# Altium PCB BPD30M.PcbDoc (part 2 of 2)
Units mm, origin at the board's own origin, x right, y up, seen from the top; angles counter-clockwise.
Board outline 65 x 70 mm, 4 copper layers (Top Layer, Ground, Power, Bottom Layer), stack 0.603 mm thick; 94 components, 61 nets, 303 pads, 160 vias.
Unrouted connection lines stored in the file: 9.
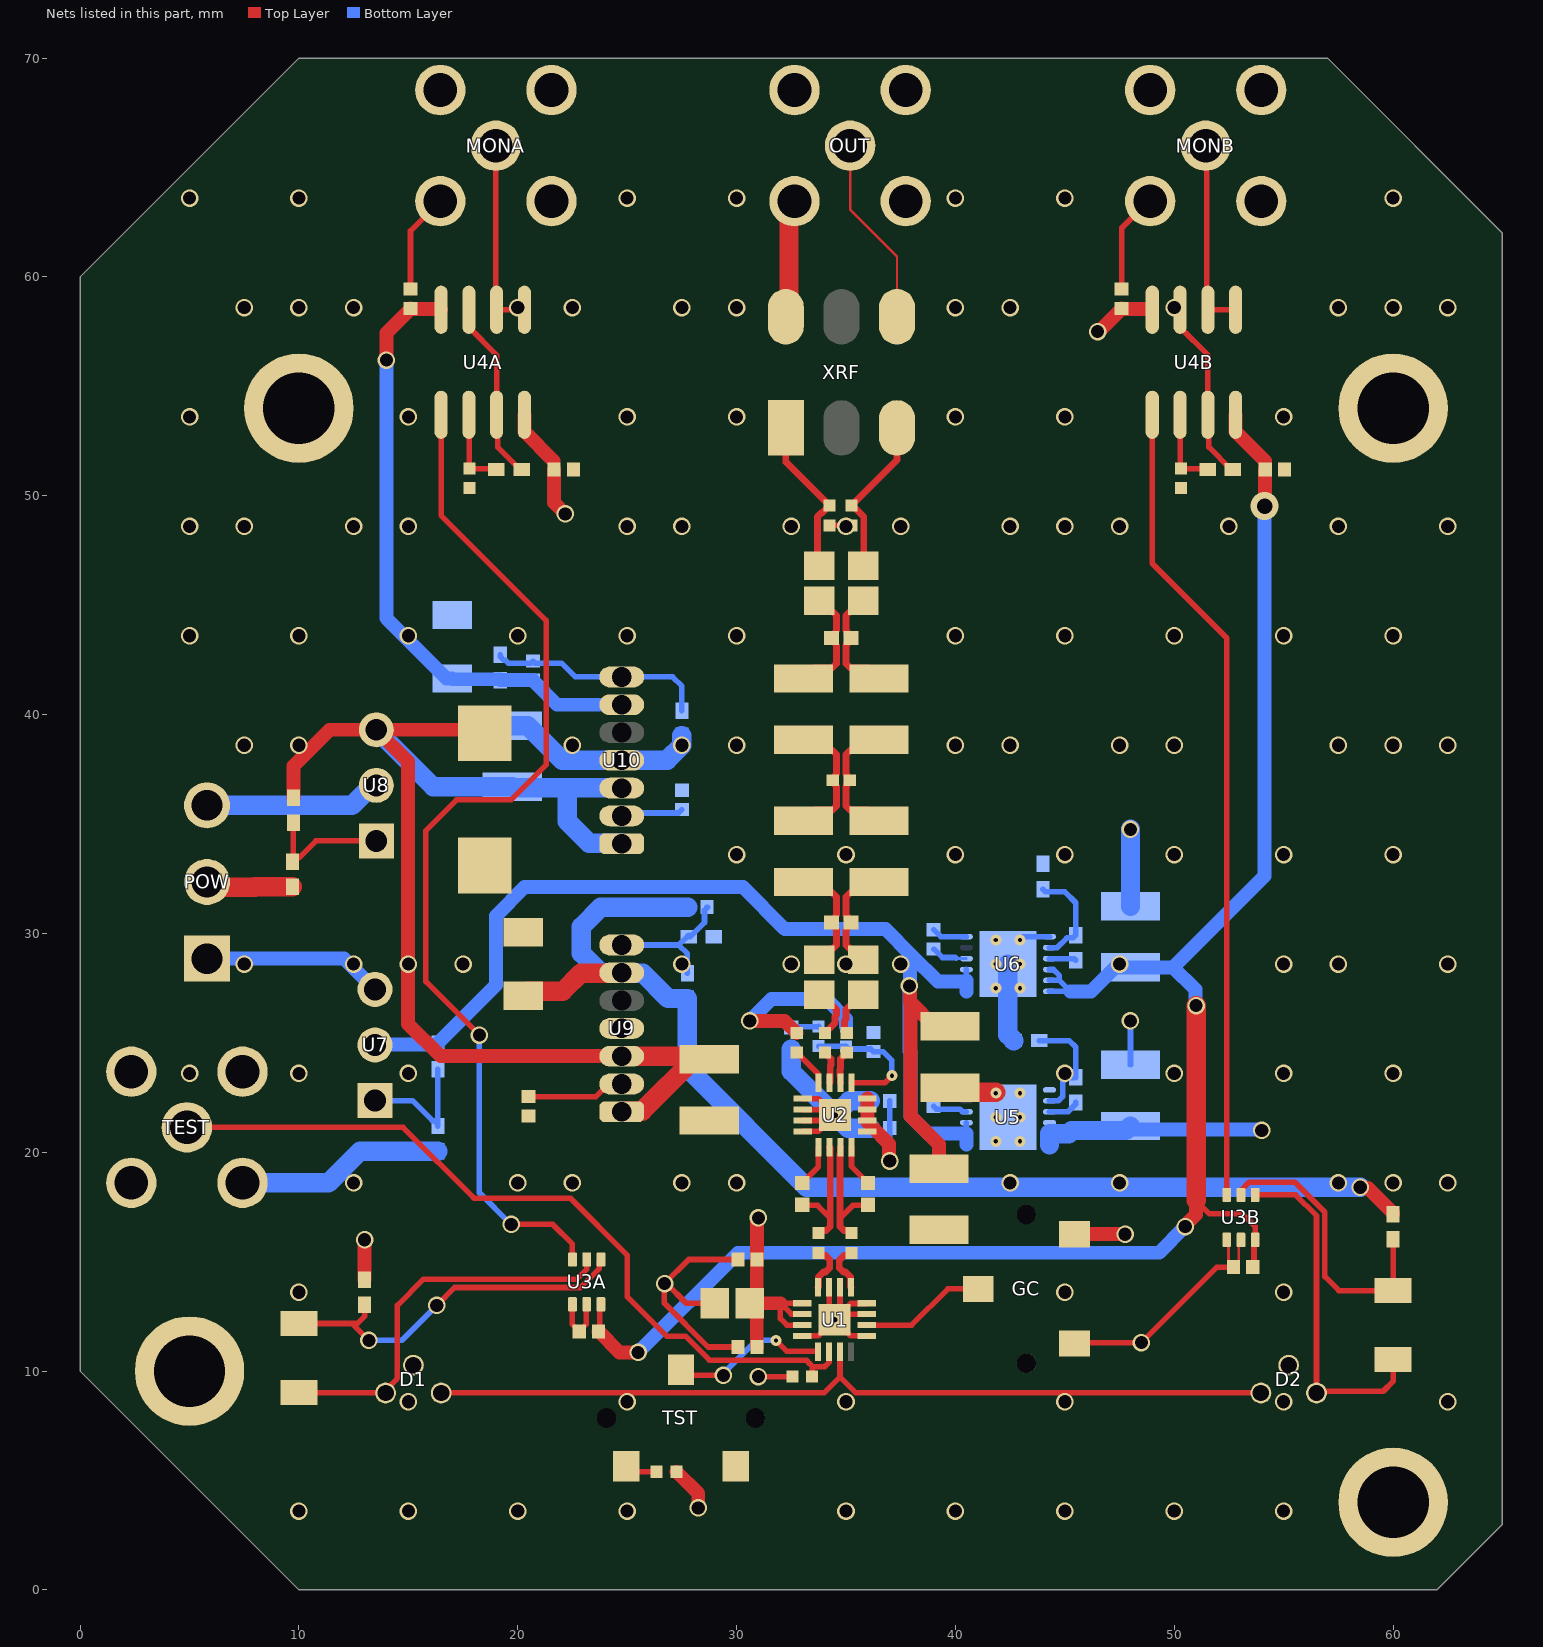
[diagram p4: the nets of this part, all layers, seen from the top]

## Part data (continued)
R31 R32: library part ERJ-2GE0R00X, "RES SMD 0.0OHM JUMPER 1/10W 0402", Device Package="0402 (1005 Metric)", Manufacturer="Panasonic Electronic Components", PowerRating="0.1W, 1/10W", Supplier Part Number 1=P0.0JTR-ND, TemperatureRange="-55C ~ 155C", Tolerance=Jumper, ComponentLink1Description=Datasheet, ComponentLink1URL=http://industrial.panasonic.com/www-cgi/jvcr13pz.cgi?E+PZ+3+AOA0001+ERJ2GE0R00X+7+WW, ComponentLink2Description="Digi-Key Listing", ComponentLink2URL=https://www.digikey.com/product-detail/en/panasonic-electronic-components/ERJ-2GE0R00X/P0.0JTR-ND/146727, PartId=16129, Part Number=ERJ-2GE0R00X, Price=0.0029, Supplier 1=Digi-Key
U1: "IC OPAMP GP 1 CIRCUIT 16VQFN", Device Package="16-VFQFN Exposed Pad", Frequency - Transition=130Mhz, Manufacturer="Texas Instruments", Manufacturer_Part_Number=OPA857IRGTT, Supplier Part Number 1=296-37283-1-ND, Built_By=EMA_UL_Team, ComponentLink1Description=Datasheet, ComponentLink1URL=http://www.ti.com/lit/ds/symlink/opa857.pdf, ComponentLink2Description="Digi-Key Listing", ComponentLink2URL=https://www.digikey.com/product-detail/en/texas-instruments/OPA857IRGTT/296-37283-1-ND/4733032, Copyright="Copyright (C) 2018 Accelerated Designs. All rights reserved", PartId=9797, Part Number=OPA857, Price=6.43, RefDes=RefDes, Series=-, Supplier 1=Digi-Key, Type=DEV, Vendor="Texas Instruments"
U2: "IC OPAMP DIFF 1 CIRCUIT 16VQFN", Device Package="16-VFQFN Exposed Pad", Frequency - Transition=850Mhz, Manufacturer="Texas Instruments", Supplier Part Number 1=296-38343-1-ND, Built_By=EMA_UL_Team, ComponentLink1Description=Datasheet, ComponentLink1URL=http://www.ti.com/lit/ds/symlink/ths4541.pdf, ComponentLink2Description="Digi-Key Listing", ComponentLink2URL=https://www.digikey.com/product-detail/en/texas-instruments/THS4541IRGTT/296-38343-1-ND/4968310, Copyright="Copyright (C) 2018 Accelerated Designs. All rights reserved", Manufacturer_Part_Number=THS4541IRGTT, PartId=9798, Part Number=THS4541IRGTT, Price=6.57, RefDes=RefDes, Supplier 1=Digi-Key, Type=DEV, Vendor="Texas Instruments"
U3A U3B: library part CMP-2000-06456-1, "Voltage Output, High / Low-Side Measurement, Bi-Directional Zero-Drift Series, Current Shunt Monitor, 2.7 to 26 V, -40 to 125 degC, 6-Pin SOT-23 (DCK6), Green (RoHS & no Sb/Br), Tape and Reel", Case/Package=SC, Input Bias Current=35uA, Input Offset Voltage (Vos)=35uV, Manufacturer=TexasInstruments, Manufacturer 1="Texas Instruments", Maximum Operating Temperature=+125C, Max Input Voltage=26V, Max Operating Temperature=125°C, Minimum Operating Temperature=-40C, Min Input Voltage=-300mV, Min Operating Temperature=-40°C, Min Supply Voltage=2.7V, Nominal Supply Current=65uA, Operating Supply Current=115uA, Operating Supply Voltage=24V, Package / Case=SOT-23-6, Package Description="6-Pin Plastic Small Outline, Body 2 x 1.25 mm, Pitch 0.65 mm", Package Quantity=1, Package Reference=DCK6, Package Version="4093553-4/G, 01/2007", Power Supply Rejection Ratio (PSRR)=140dB, Supplier Part Number 1=296-23586-1-ND, Vcm - Common Mode Voltage=-0.3Vto+26V, Voltage Gain=60dB, Vos - Input Offset Voltage=60uV, Accuracy=1%, Amplifier Type=CurrentSense, Bandwidth=14kHz, Brand=TexasInstruments, CMRR - Common Mode Rejection Ratio=105dB, Common Mode Rejection Ratio=105dB, ComponentLink1Description=https://datasheet.ciiva.com/15132/getdatasheetpartid-49972-15132526.pdf?src-supplier=Verical, ComponentLink1URL=https://datasheet.ciiva.com/15132/getdatasheetpartid-49972-15132526.pdf?src-supplier=Verical, ComponentLink2Description=https://datasheet.ciiva.com/2978/ina213-2978003.pdf?src-supplier=Avnet, ComponentLink2URL=https://datasheet.ciiva.com/2978/ina213-2978003.pdf?src-supplier=Avnet, ComponentLink3Description=https://datasheet.ciiva.com/2976/ina213-2976375.pdf?src-supplier=Avnet, ComponentLink3URL=https://datasheet.ciiva.com/2976/ina213-2976375.pdf?src-supplier=Avnet, ComponentLink4Description=https://datasheet.ciiva.com/1484/1848953-1484619.pdf?src-supplier=Element14, ComponentLink4URL=https://datasheet.ciiva.com/1484/1848953-1484619.pdf?src-supplier=Element14, ComponentLink5Description=https://datasheet.ciiva.com/1939/ina211-1939836.pdf?src-supplier=Digi-Key, ComponentLink5URL=https://datasheet.ciiva.com/1939/ina211-1939836.pdf?src-supplier=Digi-Key, ComponentLink6Description=https://datasheet.ciiva.com/1939/ina211-1939837.pdf?src-supplier=Digi-Key, ComponentLink6URL=https://datasheet.ciiva.com/1939/ina211-1939837.pdf?src-supplier=Digi-Key, ComponentLink7Description=https://datasheet.ciiva.com/1939/ina211-1939838.pdf?src-supplier=Digi-Key, ComponentLink7URL=https://datasheet.ciiva.com/1939/ina211-1939838.pdf?src-supplier=Digi-Key, Datasheet URL=http://www.ti.com/lit/gpn/INA214?keyMatch=INA214AIDCKT&tisearch=Search-EN-Everything, Datasheet Version="Rev. G, 07/2014", Development Kit=INA210-214EVM, Gain Bandwidth Product=4kHz, Gain Error=0.02%, Gain V/V=100V/V, GBP - Gain Bandwidth Product=30kHz, Height=0.9mm, Lead Free="Lead Free", Length=2mm, Manufacturer Part Number 1=INA212AIDCKT, Manufacturer URL=http://www.ti.com/, Max Supply Voltage=26V, Mount="Surface Mount", Mounting Style=SMD/SMT, Mounting Technology=SurfaceMount, Number of Amplifiers=1, Number of Channels=1Channel, Number of Elements=1, Number of Pins=6, Packaging=Reel, Pricing 1="1=1.54000, 10=1.38100, 100=1.11010 (USD)", Product=CurrentSenseAmplifiers, Product Category=CurrentSenseAmplifiers, Radiation Hardening=No, REACH SVHC="No SVHC", RoHS=True, Series=INA214, Slew Rate=0.04V/µs, Stock 1=3857, Supplier 1=Digi-Key, Supply Voltage - Max=26V, Supply Voltage - Min=2.7V, Termination=SMD/SMT, Topology=CurrentShuntFeedback, Unit Weight=0.000088oz, Unity Gain Bandwidth Product=14kHz, Weight=8.8E-05oz, Width=1.25mm
U4A U4B: library part CMP-0384-00855-1, "Double Channel Ultra Low Noise Operational Amplifier, 6.5 MHz BW, 12 V/us SR, Industrial, 8-pin SOIC (R-8), Tube", Amplifiers Per Package=2, Generic Part Number=ADA4075-2, Input Bias Current=30nA, Input Offset Voltage=300uV, Manufacturer="Analog Devices", Code_JEDEC=MS-012-AA, ComponentLink1Description="Manufacturer URL", ComponentLink1URL=http://www.analog.com/en/index.html, ComponentLink2Description=Datasheet, ComponentLink2URL=http://www.analog.com/static/imported-files/data_sheets/ADA4075-2.pdf, ComponentLink3Description="Package Specification", ComponentLink3URL=http://www.analog.com/static/imported-files/packages/PKG_PDF/SOIC_Narrow%20(R)/R_8.pdf, DatasheetVersion="Rev. B", Iq/Amp=1.8mA, Mounting Technology="Surface Mount", PackageDescription="8-Pin Standard Small Outline Package, Body 3.9 x 4.9 mm, Pitch 1.27 mm", PackageReference=R-8, PackageVersion=060506-A, PartNumber=ADA4075-2ARZ, Slew Rate=12V/us, Small Signal Bandwidth=6.5MHz, V Span Max=36V, V Span Min=24V
U5 U6: "IC REG LIN POS ADJ 800MA 12WSON", Device Package="12-WSON (4x4)", Manufacturer="Texas Instruments", Supplier Part Number 1=296-36225-1-ND, Built_By=EMA_UL_Team, ComponentLink1Description=Datasheet, ComponentLink1URL=http://www.ti.com/lit/ds/symlink/lp38798.pdf, ComponentLink2Description="Digi-Key Listing", ComponentLink2URL=https://www.digikey.com/product-detail/en/texas-instruments/LP38798SDE-ADJ-NOPB/296-36225-1-ND/4240231, Copyright="Copyright (C) 2018 Accelerated Designs. All rights reserved", Manufacturer_Part_Number=LP38798SDE-ADJ/NOPB, PartId=7965, Part Number=LP38798SDE-ADJ/NOPB, Price=3.59, RefDes=RefDes, Supplier 1=Digi-Key, Topology="Positive Adjustable", Type=DEV, Vendor="Texas Instruments"
U7: library part CMP-0062-02498-3, "3-Amp Adjustable Regulator, 3-pin TO-220", Manufacturer="Texas Instruments", PackageTopMarking="NSUZXYTTE#*LM350T P+", PowerWise=N, ComponentLink1Description="Datasheet URL", ComponentLink1URL=http://www.ti.com/general/docs/lit/getliterature.tsp?genericPartNumber=LM350-N&fileType=pdf, CompType="LDO IC", PackageDescription="TO-220, Molded, 3 Lead, Straight", PackageReference=NDE0003A, PinCount=3, RoHS=N
U8: library part CMP-0062-02479-3, "3-Terminal Adjustable Negative Regulator, 3-pin TO-220, Pb-Free", Manufacturer="Texas Instruments", PackageTopMarking="NSUZXYTTE#*LM337T P+", PowerWise=N, ComponentLink1Description="Datasheet URL", ComponentLink1URL=http://www.ti.com/general/docs/lit/getliterature.tsp?genericPartNumber=LM337-N&fileType=pdf, CompType="LDO IC", PackageDescription="TO-220, Molded, 3 Lead, Straight", PackageReference=NDE0003A, PinCount=3, RoHS=Y
U9 U10: library part CMP-0395-00758-2, "Single Output High PSRR LDO, 1 A, Adjustable -1.18 to -33 V Output, -3 to -36 V Input, with Ultra-Low Noise, 7-pin TO-220 (KC), -40 to 125 degC, Pb-Free (RoHS)", Manufacturer="Texas Instruments", Accuracy(%)=1.5, ComponentLink1Description="Manufacturer URL", ComponentLink1URL=http://www.ti.com/, ComponentLink2Description=Datasheet, ComponentLink2URL=http://www.ti.com/general/docs/lit/getliterature.tsp?genericPartNumber=TPS7A3301&fileType=pdf, ComponentLink3Description="Package Specification", ComponentLink3URL=http://www.ti.com/litv/pdf/msot010, DatasheetVersion=SBVS169B, Eco-Plan="Pb-Free (RoHS)", Iout(Max)(A)=1, Iq(Typ)(mA)=0.21, Mounting Technology="Through Hole", PackageDescription="7-Pin Plastic Flange Mount", PackageReference=KC0007A, PackageVersion=4040251/B, PartNumber=TPS7A3301KC, SubFamily="Single Channel LDO", Vdo(Typ)(mV)=290, Vin(Max)(V)=-36, Vin(Min)(V)=-3, Vout Adj(Max)(V)=-33, Vout Adj(Min)(V)=-1.18
XRF: "RF XFMR 50Ohm / SURF MOUNT / RoHS", Inductance A=10uH, Manufacturer=Mini-Circuits, ComponentLink1Description=Datasheet, ComponentLink1URL=https://www.minicircuits.com/pdfs/ADT1-1+.pdf, ComponentLink2Description="Mini-Circuit Listing", ComponentLink2URL=https://www.minicircuits.com/WebStore/dashboard.html?model=ADT1-1%2B, Coupling Factor=1, Inductance B=10uH, PartId=21136, Part Number=ADT1-1+, Supplier 1=Mini-Circuits, Supplier Part Number 1=ADT1-1+

## Free pads (board coordinates)
  round 5 hole 3.264: 1(5,10) 1(10,54) 1(60,4) 1(60,54)

## Via types
v1: diameter 0.8, hole 0.6, Top Layer to Ground, tented top, 92 vias
v2: diameter 0.8, hole 0.6, Ground to Bottom Layer, tented bottom, 27 vias
v3: diameter 0.8, hole 0.6, Top Layer to Bottom Layer, 14 vias
v4: diameter 0.5, hole 0.2, Top Layer to Bottom Layer, 14 vias
v5: diameter 0.8, hole 0.6, Top Layer to Power, 5 vias
v6: diameter 0.8, hole 0.6, Top Layer to Ground, 3 vias
v7: diameter 0.8, hole 0.6, Power to Bottom Layer, 2 vias
v8: diameter 0.8, hole 0.6, Ground to Bottom Layer, 2 vias
v9: diameter 1.27, hole 0.711, Top Layer to Power, 1 vias

## Nets (pads, with @x,y where several pads share a name; then routed paths per layer and width w, separated by ;. In a path a pad name is that pad's centre, name@x,y a point inside that pad or via, vN(x,y) a via of type N, cw(c..) or ccw(c..) an arc to the next point about the centre after c; other vN are vias at no path point)
+3.3: C1.2 C2.2 C3.2 C4.2 C5.2 C15.2 GC.3 R4.1 R7.2 R10.1 R31.1 U1.9 U1.10 U1.11 U2.5 U2.6 U2.7 U2.8 U5.10 U5.11 U5.12 | length 42.2
  Top Layer w0.254: U1.11@33,12.1 32.3,12.1 32,12.4 32,13.1 ; U1.10@33,12.6 32.5,12.6 32,13.1 ; U1.9@33,13.1 32,13.1
  Top Layer w0.635: R31.1@13,14.175 v5(13,16) ; R4.1@27.25,5.4 28.25,4.4 v5(28.25,3.75) ; v3(30.6,26) 32.2,26 R7.2@32.75,25.45 ; C2.2@30.94,11.1 30.923,11.103 30.923,12.777 C3.2@30.6,13.1 ; v5(31,17) 31,16.955 30.94,16.895 C1.2@30.94,15.1 30.923,15.097 30.923,13.422 C3.2@30.6,13.1 ; 32,13.1 C3.2@30.6,13.1 ; U2.8@35.975,22.45 U2.7@35.975,21.95 U2.6@35.975,21.45 35.975,21.38 36.19,21.165 36.968,20.387 36.968,19.632 v3(37,19.6) ; GC.3@45.443,16.256 47.744,16.256 v5(47.75,16.25)
  Bottom Layer w0.254: v3(37,19.6) C5.2@37,21.1 C4.2@37,22.35
  Bottom Layer w0.635: v3(30.6,26) 31.6,27 34.1,27 35,26.1 R10.1@35,25.738 ; C15.2@48,21.2 48.168,21.032 53.968,21.032 v7(54,21)
  Bottom Layer w0.889: U5.12@44.3,20.35 U5.11@44.3,20.85 45.172,20.85 45.317,20.994 47.795,20.994 C15.2@48,21.2
+5: C10A.2 C10B.2 C18.2 C28A.2 C28B.2 U3A.3 U3B.3 U4A.8 U4B.8 U6.10 U6.11 U6.12 | length 88.6
  Top Layer w0.254: C10A.2@23.69,11.8 23.745,11.855 23.745,12.995 U3A.3@23.8,13.05 ; 51,17.8 51.619,17.181 53.119,17.181 53.7,16.6 U3B.3@53.7,16 53.645,15.945 53.645,14.805 C10B.2@53.59,14.75
  Top Layer w0.635: U4A.8@20.305,53.7 20.305,52.935 21.642,51.598 ; C28A.2@21.66,51.2 21.66,49.681 v5(22.17,49.171) ; C10A.2@23.69,11.8 23.705,11.8 24.655,10.85 v3(25.5,10.85) ; v3(50.5,16.6) 50.5,16.645 51,17.145 51,17.8 ; U4B.8@52.805,53.7 52.805,52.935 54.142,51.598 ; v9(54.13,49.53) 54.145,49.545 54.145,51.198 54.148,51.2 C28B.2@54.16,51.2
  Top Layer w0.889: 51,17.8 v3(51,26.7)
  Bottom Layer w0.254: U6.12@44.3,27.35 45.25,27.35 44.75,27.85 ; U6.11@44.3,27.85 44.75,27.85 ; U6.10@44.3,28.35 44.471,28.35 44.75,28.071 44.75,27.85
  Bottom Layer w0.635: v3(25.5,10.85) 30.056,15.405 49.306,15.405 v3(50.5,16.6) ; 45.25,27.35 46.2,27.35 47.3,28.45 C18.2@48,28.45 49.95,28.45 ; v3(51,26.7) 50.968,26.732 50.968,27.432 49.95,28.45 ; v9(54.13,49.53) 54.13,32.63 49.95,28.45
  other v7: 54.13,49.53
+5N: C14.2 C17.2 R21.2 U5.1 U5.2 U5.3 U6.1 U6.2 U6.3 U7.2 | length 57.2
  Top Layer w0.635: v3@37.932,27.632 v3(37.9,27.6) 37.932,27.568 37.932,26.868 37.945,26.855 ; C14.2@39.25,19.25 39.25,20.35 37.945,21.655 37.945,26.855 ; C17.2@39.75,25.75 39.05,25.75 37.945,26.855
  Bottom Layer w0.254: U5.2@40.5,20.85 U5.3@40.5,21.35 ; U6.2@40.5,27.85 U6.3@40.5,28.35
  Bottom Layer w0.635: U7.2@13.478,24.902 13.502,24.926 16.333,24.926 16.35,24.943 R21.2@16.35,24.95 16.35,24.99 19,27.64 19,30.8 20.315,32.115 30.285,32.115 32.2,30.2 36.8,30.2 38,29 ; v3(37.9,27.6) 37.9,24.628 37.945,24.583 37.945,21.655 38.75,20.85 U5.2@40.5,20.85 U5.1@40.5,20.35 ; v3@37.932,27.632 37.932,28.932 38,29 ; U6.1@40.5,27.35 U6.2@40.5,27.85 40.45,27.8 39.2,27.8 38,29
+12: POW.1 U7.3 | length 8.3
  Bottom Layer w0.635: POW.1@5.8,28.85 12.07,28.85 U7.3@13.478,27.442
-3.3: C21.1 C22.2 R25.2 R32.1 U9.6 | length 55.3
  Top Layer w0.635: v3(58.5,18.4) 58.532,18.368 58.847,18.368 60,17.215 R32.1@60,17.175
  Top Layer w0.889: C22.2@20.25,27.15 20.455,27.356 22.055,27.356 22.888,28.188 24.738,28.188 U9.6@24.75,28.2
  Bottom Layer w0.889: C21.1@27.76,31.2 23.8,31.2 22.9,30.3 22.9,29.1 23.788,28.212 24.738,28.212 U9.6@24.75,28.2 24.762,28.188 25.712,28.188 26.875,27.025 R25.2@27.75,27.025 27.75,23.85 33.2,18.4 v3(58.5,18.4)
-5: C25.1 C26.2 C29A.2 C29B.2 R27.2 U4A.4 U4B.4 U10.6 | length 31.5
  Top Layer w0.635: v3(14,56.2) 14,57.445 15.1,58.545 C29A.2@15.1,58.56 15.102,58.542 16.477,58.542 16.495,58.525 U4A.4@16.495,58.5 ; v3(46.5,57.5) 46.555,57.5 47.6,58.545 C29B.2@47.6,58.56 47.602,58.542 48.977,58.542 48.995,58.525 U4B.4@48.995,58.5
  Bottom Layer w0.635: v3(14,56.2) 14,44.4 16.75,41.65 C26.2@17,41.65 17.038,41.612 19.182,41.612 19.2,41.595 R27.2@19.2,41.575 20.692,41.575 C25.1@20.7,41.567 20.7,41.552 21.802,40.45 U10.6@24.75,40.45
-5N: C19.2 C20.2 C24.2 R23.2 U8.3 U9.1 U9.3 U10.1 U10.3 | length 60.7
  Top Layer w0.635: R23.2@9.75,36.2 9.75,37.65 11.406,39.306 U8.3@13.534,39.306 ; C19.2@18.5,39.15 18.344,39.306 U8.3@13.534,39.306 ; U9.3@24.75,24.39 16.46,24.39 14.984,25.866 14.984,37.856 U8.3@13.534,39.306
  Top Layer w0.889: U9.1@24.75,21.85 24.781,21.88 25.681,21.88 C20.2@28.178,24.378 ; U9.3@24.75,24.39 24.762,24.378 C20.2@28.178,24.378 ; C20.2@28.75,24.25 28.622,24.378 C20.2@28.178,24.378
  Bottom Layer w0.889: U8.3@13.534,39.306 16.14,36.7 C24.2@19.75,36.7 19.798,36.652 22.268,36.652 ; U10.1@24.75,34.1 24.719,34.131 23.256,34.131 22.268,35.118 22.268,36.652 ; U10.3@24.75,36.64 24.738,36.652 22.268,36.652
-12: POW.3 U8.2 | length 8.1
  Bottom Layer w0.889: POW.3@5.8,35.85 12.426,35.85 13.342,36.766 U8.2@13.534,36.766
BS_N: R5.1 R9.1 U2.3 | length 6
  Top Layer w0.254: 34.72,16.981 35.308,17.569 35.825,17.569 35.825,17.425 R9.1@36,17.6
  Top Layer w0.312: U2.3@34.75,20.225 34.734,20.209 34.734,19.924 34.72,19.91 34.72,16.981 34.72,16.602 34.903,16.419 35.131,16.419 R5.1@35.25,16.3
BS_P: R6.1 R8.1 U2.2 | length 5.8
  Top Layer w0.254: R8.1@33,17.6 33.031,17.569 33.706,17.569 34.28,16.995
  Top Layer w0.312: R6.1@33.75,16.3 33.869,16.419 34.097,16.419 34.28,16.602 34.28,16.995 34.28,19.91 34.266,19.924 34.266,20.209 U2.2@34.25,20.225
F1_N: L6.1 R16.2 | length 2.4
  Top Layer w0.312: L6.1@33.785,27.2 34.279,26.706 34.382,26.706 34.565,26.523 34.565,26.264 34.493,26.192 34.493,25.908 R16.2@34.035,25.45
F1_P: L1.1 R13.2 | length 2.2
  Top Layer w0.254: L1.1@35.391,26.806 L1.1@35.785,27.2
  Top Layer w0.312: R13.2@35.035,25.45 34.933,25.552 34.933,26.01 35.005,26.083 35.005,26.523 35.188,26.706 35.291,26.706 L1.1@35.391,26.806
F2_N: C7.2 L4.1 L6.2 | length 5.2
  Top Layer w0.312: L4.1@33.06,32.35 33.554,31.856 34.382,31.856 34.565,31.673 34.565,30.847 34.529,30.81 34.529,30.664 C7.2@34.365,30.5 ; L6.2@33.785,28.8 34.279,29.294 34.382,29.294 34.565,29.477 34.565,30.153 34.529,30.19 34.529,30.336 C7.2@34.365,30.5 ; C7.2@34.345,30.5 C7.2@34.365,30.5
F2_P: C7.1 L1.2 L2.1 | length 5.2
  Top Layer w0.312: C7.1@35.225,30.5 C7.1@35.205,30.5 ; L1.2@35.785,28.8 35.291,29.294 35.188,29.294 35.005,29.477 35.005,30.153 35.041,30.19 35.041,30.336 C7.1@35.205,30.5 ; L2.1@36.51,32.35 35.81,32.35 35.316,31.856 35.188,31.856 35.005,31.673 35.005,30.847 35.041,30.81 35.041,30.664 C7.1@35.205,30.5
F3_N: C8.1 L4.2 L8.1 | length 6.1
  Top Layer w0.312: L4.2@33.06,35.15 33.554,35.644 34.382,35.644 34.565,35.827 34.565,36.713 34.519,36.76 34.519,36.896 C8.1@34.415,37 ; L8.1@33.06,38.85 33.554,38.356 34.382,38.356 34.565,38.173 34.565,37.287 34.519,37.24 34.519,37.104 C8.1@34.415,37 ; C8.1@34.395,37 C8.1@34.415,37
F3_P: C8.2 L2.2 L5.1 | length 6.1
  Top Layer w0.312: C8.2@35.175,37 C8.2@35.155,37 ; L2.2@36.51,35.15 36.016,35.644 35.188,35.644 35.005,35.827 35.005,36.713 35.051,36.76 35.051,36.896 C8.2@35.155,37 ; L5.1@36.51,38.85 36.016,38.356 35.188,38.356 35.005,38.173 35.005,37.287 35.051,37.24 35.051,37.104 C8.2@35.155,37
F4_N: C9.1 L7.1 L8.2 | length 5.2
  Top Layer w0.312: L8.2@33.06,41.65 33.554,42.144 34.382,42.144 34.565,42.327 34.565,43.153 34.529,43.19 34.529,43.336 C9.1@34.365,43.5 ; L7.1@33.785,45.2 34.279,44.706 34.382,44.706 34.565,44.523 34.565,43.847 34.529,43.81 34.529,43.664 C9.1@34.365,43.5 ; C9.1@34.345,43.5 C9.1@34.365,43.5
F4_P: C9.2 L3.1 L5.2 | length 5.2
  Top Layer w0.312: C9.2@35.225,43.5 C9.2@35.205,43.5 ; L3.1@35.785,45.2 35.291,44.706 35.188,44.706 35.005,44.523 35.005,43.847 35.041,43.81 35.041,43.664 C9.2@35.205,43.5 ; L5.2@36.51,41.65 36.016,42.144 35.188,42.144 35.005,42.327 35.005,43.153 35.041,43.19 35.041,43.336 C9.2@35.205,43.5
FS_N: L7.2 R15.1 XRF.1 | length 7.4
  Top Layer w0.312: XRF.1@32.25,53.1 32.25,51.55 R15.1@34.25,49.55 33.908,49.208 33.858,49.208 33.692,49.042 33.692,46.893 L7.2@33.785,46.8
FS_P: L3.2 R14.2 XRF.3 | length 7.4
  Top Layer w0.312: L3.2@35.785,46.8 35.808,46.8 35.808,49.042 35.3,49.55 R14.2@35.25,49.55 37.33,51.63 XRF.3@37.33,53.1
GND: C1.1 C2.1 C3.1 C4.1 C5.1 C6.1 C10A.1 C10B.1 C13.2 C14.1 C15.1 C16.2 C17.1 C18.1 C19.1 C20.1 C22.1 C23.1 C24.1 C26.1 C27.1 C28A.1 C28B.1 C29A.1 C29B.1 D1.2 D2.2 GC.1 MONA.G MONB.G OUT.G pad.1 POW.2 R3.2 R12.1 R17.2 R19.2 R22.1 R24.1 R26.1 R28.1 R29A.1 R29B.1 TEST.G TST.3 U1.1 U1.3 U1.4 U1.6 U1.7 U1.12 U1.17 U1.V U2.13 U2.14 U2.15 U2.16 U2.17 U2.V U3A.1 U3A.2 U3B.1 U3B.2 U5.6 U5.7 U5.13 U6.6 U6.7 U6.13 U9.4 U10.4 XRF.6 | length 104.8
  Top Layer w0.127: U3B.1@52.4,16 52.474,15.926 52.474,14.986 C10B.1@52.71,14.75 52.947,14.986 52.947,15.897 U3B.2@53.05,16
  Top Layer w0.254: C29A.1@15.1,59.44 15.1,62.1 16.02,63.02 MONA.G@16.397,63.02 ; U3A.1@22.5,13.05 22.5,12.13 C10A.1@22.81,11.82 ; C10A.1@22.81,11.8 C10A.1@22.81,11.82 ; U3A.2@23.15,13.05 23.136,13.036 23.136,12.146 C10A.1@22.81,11.82 ; C3.1@29,13.1 27.7,13.1 26.8,14 v6(26.713,14) ; C2.1@30.06,11.1 28.7,11.1 26.7,13.1 26.7,13.987 v6(26.713,14) ; C1.1@30.06,15.1 27.813,15.1 v6(26.713,14) ; v6(31,9.75) R3.2@32.55,9.75 ; U1.12@33,11.6 33.013,11.613 33.738,11.613 U1.17@34.475,12.35 ; U2.16@33.025,20.95 33.038,20.963 33.763,20.963 U2.17@34.25,21.45 ; U2.15@33.025,21.45 U2.17@34.25,21.45 ; U2.14@33.025,21.95 34.25,21.95 33.763,22.437 ; U2.13@33.025,22.45 33.038,22.437 33.763,22.437 ; U1.7@34.225,13.825 34.225,12.6 U1.17@34.475,12.35 ; U1.6@34.725,13.825 U1.17@34.725,12.6 ; U1.1@35.95,11.6 35.937,11.613 35.212,11.613 U1.17@34.475,12.35 ; U1.3@35.95,12.6 U1.17@34.725,12.6 ; U1.4@35.95,13.1 35.937,13.087 35.212,13.087 U1.17@34.725,12.6 ; GC.1@45.443,11.256 45.487,11.3 v6(48.5,11.3) 51.95,14.75 C10B.1@52.71,14.75 ; C29B.1@47.6,59.44 47.6,62.242 48.378,63.02 MONB.G@48.897,63.02 ; 33.763,22.437 U2.17@34.5,21.7 U2.17@34.25,21.45 ; U1.17@34.475,12.35 U1.17@34.725,12.6
  Top Layer w0.889: POW.2@5.8,32.35 6.032,32.118 7.982,32.118 7.988,32.125 R24.1@9.7,32.125 ; XRF.6@32.25,58.18 32.396,58.326 32.396,62.769 OUT.G@32.647,63.02 ; C17.1@39.75,22.95 39.956,22.744 v4@41.85,22.744
  Bottom Layer w0.254: C13.2@39,22.98 39.128,22.852 40.498,22.852 U5.6@40.5,22.85 41.7,22.85 v4(41.85,22.7) U5.13@41.85,22.744 ; C16.2@39,30.165 39.02,30.165 39.335,29.85 U6.6@40.5,29.85 ; v4(42.95,29.7) 43.1,29.85 U6.7@44.3,29.85 ; C15.1@48,24 v8(48,26)
  Bottom Layer w0.889: TEST.G@7.422,18.6 11.352,18.6 12.802,20.05 R22.1@16.35,20.05 ; C24.1@19.75,39.5 20.45,39.5 22.04,37.91 U10.4@24.75,37.91 24.762,37.922 26.822,37.922 v1(27.5,38.6) R28.1@27.5,39.025 ; R12.1@32.5,24.7 32.5,23.7 U2.V@34.5,21.7 ; C5.1@36.12,21.1 35.1,21.1 U2.V@34.5,21.7 ; C4.1@36.12,22.35 35.15,22.35 U2.V@34.5,21.7 ; U6.13@42.4,28.6 42.4,25.375 R17.2@42.675,25.1 ; C18.1@48,31.25 v8(48,34.75)
  other v1: 10,3.6 15,3.6 20,3.6 25,3.6 35,3.6 40,3.6 45,3.6 50,3.6 55,3.6 62.5,8.6 10,13.6 45,13.6 55,13.6 12.5,18.6 22.5,18.6 27.5,18.6 42.5,18.6 47.5,18.6 57.5,18.6 62.5,18.6 5,23.6 10,23.6 15,23.6 45,23.6 50,23.6 55,23.6 60,23.6 7.5,28.6 12.5,28.6 17.5,28.6 27.5,28.6 32.5,28.6 37.5,28.6 47.5,28.6 57.5,28.6 62.5,28.6 30,33.6 35,33.6 40,33.6 45,33.6 50,33.6 55,33.6 60,33.6 7.5,38.6 22.5,38.6 42.5,38.6 47.5,38.6 57.5,38.6 62.5,38.6 5,43.6 10,43.6 15,43.6 20,43.6 25,43.6 30,43.6 40,43.6 45,43.6 50,43.6 55,43.6 60,43.6 7.5,48.6 12.5,48.6 27.5,48.6 32.5,48.6 37.5,48.6 42.5,48.6 47.5,48.6 52.5,48.6 57.5,48.6 62.5,48.6 5,53.6 15,53.6 25,53.6 30,53.6 40,53.6 45,53.6 55,53.6 7.5,58.6 12.5,58.6 22.5,58.6 27.5,58.6 42.5,58.6 57.5,58.6 62.5,58.6 5,63.6 10,63.6 25,63.6 30,63.6 40,63.6 45,63.6 60,63.6
  other v2: 15,8.6 25,8.6 35,8.6 45,8.6 55,8.6 20,18.6 30,18.6 60,18.6 15,28.6 35,28.6 55,28.6 10,38.6 30,38.6 40,38.6 50,38.6 60,38.6 5,48.6 15,48.6 25,48.6 35,48.6 45,48.6 10,58.6 20,58.6 30,58.6 40,58.6 50,58.6 60,58.6
  other v4: 41.85,20.5 42.95,20.5 41.85,21.6 42.95,21.6 42.95,22.7 41.85,27.5 42.95,27.5 41.85,28.6 42.95,28.6 41.85,29.7
MonA_N: D1.1 R1.2 U3A.5 | length 18
  Top Layer w0.254: R1.2@10,9.025 10.025,9 D1.1@13.96,9 13.96,9.129 14.501,9.67 14.501,13.001 15.7,14.2 22.7,14.2 23.15,14.65 U3A.5@23.15,15.1
MonA_P: R1.1 R31.2 U3A.4 | length 17.1
  Top Layer w0.254: R1.1@10,12.175 12.425,12.175 ; R31.2@13,13.025 13,12.5 12.675,12.175 12.425,12.175 ; v3(13.2,11.4) 12.425,12.175 ; v3(16.3,13) 17.119,13.819 22.858,13.819 23.727,14.688 23.727,15.027 U3A.4@23.8,15.1
  Bottom Layer w0.254: v3(13.2,11.4) 14.7,11.4 v3(16.3,13)
MonB_N: R2.1 R32.2 U3B.5 | length 13.4
  Top Layer w0.127: U3B.5@53.05,18.05 U3B.5@53.05,18.175
  Top Layer w0.254: U3B.5@53.05,18.175 53.05,18.255 53.424,18.629 55.51,18.629 56.881,17.258 56.881,14.319 57.525,13.675 R2.1@60,13.675 R32.2@60,16.025
MonB_P: D2.3 R2.2 U3B.4 | length 16
  Top Layer w0.254: U3B.4@53.7,18.05 55.55,18.05 56.5,17.1 D2.3@56.5,9 56.577,9.077 59.552,9.077 60,9.525 R2.2@60,10.525
NetC6_2: C6.2 R10.2 R11.2 U2.9 | length 6.3
  Top Layer w0.254: U2.9@35.25,23.175 36.775,23.175 v4(37.1,23.5)
  Bottom Layer w0.254: R11.2@33.75,24.85 33.756,24.844 34.994,24.844 R10.2@35,24.838 35.119,24.719 36.131,24.719 C6.2@36.25,24.6 36.7,24.6 37.1,24.2 v4(37.1,23.5)
NetC13_1: C13.1 U5.4 | length 1.6
  Bottom Layer w0.254: C13.1@39,22.1 39.129,21.971 40.208,21.971 40.329,21.85 U5.4@40.5,21.85
NetC16_1: C16.1 U6.4 | length 1.7
  Bottom Layer w0.127: 40.026,28.874 40.05,28.85 U6.4@40.5,28.85
  Bottom Layer w0.254: C16.1@39,29.285 39.02,29.285 39.405,28.9 40,28.9 40.026,28.874
NetC21_2: C21.2 R25.1 R26.2 U9.7 | length 6.6
  Bottom Layer w0.254: U9.7@24.75,29.47 27.355,29.47 ; R25.1@27.75,28.175 27.75,29.075 27.355,29.47 ; C21.2@28.64,31.2 28.682,31.2 28.661,31.179 28.534,31.052 28.534,30.499 27.885,29.85 R26.2@27.81,29.85 27.806,29.921 27.772,29.888 27.355,29.47
NetC23_2: C23.2 U9.2 | length 4.5
  Top Layer w0.254: C23.2@20.5,22.54 23.569,22.54 24.149,23.12 U9.2@24.75,23.12
NetC25_2: C25.2 R27.1 R28.2 U10.7 | length 10.1
  Bottom Layer w0.254: R27.1@19.2,42.725 19.2,42.65 19.373,42.477 19.448,42.477 19.575,42.35 20.603,42.35 C25.2@20.7,42.447 20.797,42.35 22,42.35 22.63,41.72 U10.7@24.75,41.72 27.08,41.72 27.5,41.3 R28.2@27.5,40.175
NetC27_2: C27.2 U10.2 | length 2.9
  Bottom Layer w0.254: U10.2@24.75,35.37 24.883,35.503 27.343,35.503 C27.2@27.5,35.66
NetD1_3: D1.3 D2.1 U1.15 | length 39.2
  Top Layer w0.254: D1.3@16.5,9 34,9 34.725,9.725 ; U1.15@34.725,10.875 34.725,9.725 ; D2.1@53.96,9 35.45,9 34.725,9.725
"NetGain Control_2": GC.2 U1.2 | length 5.8
  Top Layer w0.254: U1.2@35.95,12.1 38,12.1 39.656,13.756 GC.2@41.043,13.756
NetMONA_S: MONA.S U4A.1 U4A.2 | length 8.4
  Top Layer w0.254: MONA.S@18.937,65.56 18.986,65.511 18.986,58.549 U4A.2@19.035,58.5 U4A.1@20.305,58.5
NetMONB_S: MONB.S U4B.1 U4B.2 | length 8.4
  Top Layer w0.254: MONB.S@51.437,65.56 51.486,65.511 51.486,58.549 U4B.2@51.535,58.5 U4B.1@52.805,58.5
NetOUT_S: OUT.S XRF.4 | length 8.7
  Top Layer w0.112: OUT.S@35.187,66 35.187,63.076 37.33,60.932 XRF.4@37.33,58.18
NetR3_1: R3.1 TEST.S U1.14 | length 36
  Top Layer w0.254: TEST.S@4.882,21.14 14.76,21.14 18,17.9 22.4,17.9 25,15.3 25,13.4 26.8,11.6 27.661,11.6 28.761,10.5 33.182,10.5 33.331,10.351 33.331,10.345 33.45,10.226 ; R3.1@33.45,9.75 33.45,10.226 ; U1.14@34.225,10.875 34.225,10.4 34.021,10.196 33.48,10.196 33.45,10.226
NetR4_2: R4.2 TST.1 | length 1.5
  Top Layer w0.254: TST.1@24.956,5.657 25.213,5.4 R4.2@26.35,5.4
NetR7_1: R7.1 U2.12 | length 1.8
  Top Layer w0.254: R7.1@32.75,24.55 33.737,23.563 33.737,23.188 U2.12@33.75,23.175
NetR8_2: R8.2 U2.1 | length 1.9
  Top Layer w0.254: R8.2@33,18.6 33.737,19.337 33.737,20.212 U2.1@33.75,20.225
NetR9_2: R9.2 U2.4 | length 1.9
  Top Layer w0.254: U2.4@35.25,20.225 35.25,19.35 R9.2@36,18.6
NetR11_1: R11.1 R12.2 | length 1.3
  Bottom Layer w0.254: R12.2@32.5,25.7 32.525,25.725 33.725,25.725 R11.1@33.75,25.75
NetR14_1: R14.1 R15.2 | length 1
  Top Layer w0.254: R15.2@34.25,48.65 R14.1@35.25,48.65
NetR17_1: R17.1 R18.2 U5.8 | length 5.2
  Bottom Layer w0.254: R17.1@43.825,25.1 45.2,25.1 45.5,24.8 R18.2@45.5,23.425 45.475,23.4 45.1,23.4 44.9,23.2 44.9,22.547 44.705,22.352 44.302,22.352 U5.8@44.3,22.35
NetR18_1: R18.1 U5.9 | length 1.4
  Bottom Layer w0.254: U5.9@44.3,21.85 45.15,21.85 45.5,22.2 R18.1@45.5,22.275
NetR19_1: R19.1 R20.2 U6.8 | length 4.7
  Bottom Layer w0.254: R19.1@44,32.025 44.125,31.9 45,31.9 45.5,31.4 R20.2@45.5,29.925 45.375,29.8 45.1,29.8 44.652,29.352 44.302,29.352 U6.8@44.3,29.35
NetR20_1: R20.1 U6.9 | length 1.2
  Bottom Layer w0.254: U6.9@44.3,28.85 44.302,28.848 45.427,28.848 R20.1@45.5,28.775
NetR21_1: R21.1 R22.2 U7.1 | length 5.9
  Bottom Layer w0.254: U7.1@13.478,22.362 15.188,22.362 16.102,21.448 16.177,21.448 R22.2@16.35,21.275 ; R22.2@16.35,21.2 R22.2@16.35,21.275 ; R21.1@16.35,23.8 R22.2@16.35,21.275
NetR23_1: R23.1 R24.2 U8.1 | length 6.1
  Top Layer w0.254: R24.2@9.7,33.275 9.75,33.2 R24.2@9.75,33.275 ; R23.1@9.75,35.05 R24.2@9.75,33.275 ; U8.1@13.534,34.226 10.776,34.226 9.998,33.448 9.923,33.448 R24.2@9.75,33.275
NetR29A_2: R29A.2 R30A.1 U4A.6 | length 3.7
  Top Layer w0.254: U4A.6@17.765,53.7 17.782,53.683 17.782,51.267 R29A.2@17.8,51.25 17.825,51.225 19,51.225 R30A.1@19.025,51.2
NetR29B_2: R29B.2 R30B.1 U4B.6 | length 3.7
  Top Layer w0.254: U4B.6@50.265,53.7 50.282,53.683 50.282,51.267 R29B.2@50.3,51.25 50.325,51.225 51.5,51.225 R30B.1@51.525,51.2
NetR30A_2: R30A.2 U4A.3 U4A.7 | length 8.3
  Top Layer w0.254: U4A.3@17.765,58.5 17.765,57.7 19.035,56.43 U4A.7@19.035,53.7 19.081,53.654 19.081,52.219 20.1,51.2 R30A.2@20.175,51.2
NetR30B_2: R30B.2 U4B.3 U4B.7 | length 8.3
  Top Layer w0.254: U4B.3@50.265,58.5 50.265,57.7 51.535,56.43 U4B.7@51.535,53.7 51.581,53.654 51.581,52.219 52.6,51.2 R30B.2@52.675,51.2
NetTST_2: TST.2 U1.13 | length 7.3
  Top Layer w0.254: TST.2@27.456,10.057 27.713,9.8 v3(29.4,9.8) ; v4(31.8,11.4) 32.3,10.9 33.712,10.9 33.725,10.887 U1.13@33.725,10.875
  Bottom Layer w0.254: v3(29.4,9.8) 29.4,9.9 30.9,11.4 v4(31.8,11.4)
NetU3A_6: U3A.6 U4A.5 | length 48.2
  Top Layer w0.254: U4A.5@16.495,53.7 16.495,49.105 21.3,44.3 21.3,37.7 19.7,36.1 17.2,36.1 15.8,34.7 15.8,27.8 v3(18.25,25.35) ; v3(19.7,16.7) 21.6,16.7 22.494,15.806 22.494,15.106 U3A.6@22.5,15.1
  Bottom Layer w0.254: v3(18.25,25.35) 18.25,18.15 v3(19.7,16.7)
NetU3B_6: U3B.6 U4B.5 | length 41.7
  Top Layer w0.254: 48.995,49.105 U4B.5@48.995,53.7 48.995,46.905 52.4,43.5 U3B.6@52.4,18.05
OUT_N: R16.1 U2.11 | length 1.5
  Top Layer w0.312: R16.1@34.035,24.55 34.315,24.27 34.315,23.99 34.28,23.955 34.28,23.491 34.266,23.476 34.266,23.191 U2.11@34.25,23.175
OUT_P: R13.1 U2.10 | length 1.5
  Top Layer w0.312: U2.10@34.75,23.175 34.734,23.191 34.734,23.476 34.72,23.491 34.72,23.773 34.755,23.808 34.755,24.27 R13.1@35.035,24.55
TOUT_N: R5.2 U1.5 | length 2.2
  Top Layer w0.312: U1.5@35.225,13.825 35.209,13.841 35.209,14.306 34.982,14.533 34.878,14.533 34.695,14.716 34.695,15.073 34.903,15.281 35.131,15.281 35.238,15.388 R5.2@35.25,15.4
TOUT_P: R6.2 U1.8 | length 2.2
  Top Layer w0.312: U1.8@33.725,13.825 33.741,13.841 33.741,14.306 33.968,14.533 34.072,14.533 34.255,14.716 34.255,15.098 34.072,15.281 33.844,15.281 33.737,15.387 R6.2@33.75,15.4
pads on no net: GC.MH1 GC.MH2 TST.MH1 TST.MH2 U1.16 U5.5 U6.5 U9.5 U10.5 XRF.2 XRF.5

## Polygon pours and split planes (outlines as drawn)
GND on Bottom Layer (solid, pour order 8): 10,70 57,70 65,62 65,3 62,0 10,0 0,10 0,60
no net on Bottom Layer "Bottom Layer-No Net" (solid, pour order 2): 65.25,-0.25
GND on Top Layer (solid, pour order 6): 62,0 65,3 65,62 57,70 10,70 0,60 0,10 10,0
GND on Ground (split plane): 64.49,61.789 64.49,3.211 61.789,0.51 10.211,0.51 0.51,10.211 0.51,59.789 10.211,69.49 56.789,69.49
-5 on Power (split plane): 64.49,61.789 64.49,56.729 16.5,56.729 16.45,56.72 16.408,56.692 14.946,55.229 0.51,55.229 0.51,59.789 10.211,69.49 56.789,69.49
+3.3 on Power (split plane): 43.646,27.029 41.155,27.029 41.155,30.271 43.646,30.271
+3.3 on Power (split plane): 43.62,19.98 41.13,19.98 41.13,23.22 43.62,23.22
+5 on Power (split plane): 64.49,46.229 0.51,46.229 0.51,54.97 15,54.97 15.05,54.98 15.092,55.008 16.554,56.471 64.49,56.471
+3.3 on Power (split plane): 64.49,3.211 61.789,0.51 10.211,0.51 0.51,10.211 0.51,45.971 64.49,45.971

## Other copper
Top Layer:
  region: 50.3,50.35
Power (plane layer: these items are gaps in the copper):
  lines w0.254: 0.5,46.1 65,46.1 ; 0.5,55.1 15,55.1 16.5,56.6 65,56.6 ; 43.75,23.35 43.75,19.85 41,19.85 41,23.35 43.75,23.35 ; 43.75,23.35 43.75,23.35 ; 41.025,26.9 41.025,30.4 43.775,30.4 43.775,26.9 41.025,26.9

## Silkscreen, mask and mechanical layers (free items; w line width, h text height)
Top Overlay:
  drawing of 186 lines, arcs and shapes, not listed
  text "© Enrique Morell / All rights reserved, 2019" at 6,42.9 h1.52 r90
  text "Designed by Enrique Morell / for the Weld Lab at UCSB." at 42.269,41.75 h1.52
  text "u" at 10,40 h12
  text "P" at 53.509,33.5 h10
  text "W" at 53.5,30.25 h10
  text "20k" at 46.7,18 h1.52
  text "5k" at 46.7,8.9 h1.52
  text "p" at 36,3 h5
Mechanical 1:
  region: 61.75,31.25
  lines w0.254: 0,10 0,60 10,70 57,70 65,62 65,3 62,0 10,0 0,10

## Text inside footprints (layer, text, board x,y; h text height)
U1: Top Overlay "*" at 37.975,11.1 h1.27 r180
U2: Top Overlay "*" at 32,18.85 h1.27 r90